# EAGLE board CT_schematic (EAGLE 7.6.0)

Size 100 x 80 mm. Coordinates in mm from the lower left corner, seen from the top.
Outline: 0,0 100,0 100,80 0,80 0,0
Copper layers (1*16): Top 0.035mm / dielectric 1.5mm / Bottom 0.035mm
Design rules "default": minimum track width 10mil, minimum drill 24mil, track to track 8mil, track to pad 8mil, pad to pad 8mil, via to via 8mil, smd to smd 8mil, copper to edge 40mil, drill to drill 8mil, minimum pad ring 10mil, minimum via ring 8mil, stop-mask expansion 4mil, vias tented up to drill 0mil, thermal gap 10mil

## Footprints (pad centres in the part's own frame; a part is rotated, then mirrored left to right if it is on the bottom)
C0603 = smd 0.8 x 0.8: 1 -0.762,0; 2 0.762,0
C0402 = smd 0.5 x 0.5: 1 -0.508,0; 2 0.508,0
C1210 = smd 1.2 x 2.5: 1 -1.524,0; 2 1.524,0
EXV-9H = smd 3.505 x 1.676: 1 -2.857,0; 2 2.857,0
L0603 = smd 0.8 x 0.8: 1 -0.762,0; 2 0.762,0
PJ-037B_PACKAGE = drill 3.7 square: 1 12,0 | drill 3.2 square: 2 6,0
R0603 = smd 0.8 x 0.8: 1 -0.762,0; 2 0.762,0
TFBGA64 = smd 0.35 x 0.35: A1 -1.75,1.75; A2 -1.25,1.75; A3 -0.75,1.75; A4 -0.25,1.75; A5 0.25,1.75; A6 0.75,1.75; A7 1.25,1.75; A8 1.75,1.75; B1 -1.75,1.25; B2 -1.25,1.25; B3 -0.75,1.25; B4 -0.25,1.25; B5 0.25,1.25; B6 0.75,1.25; B7 1.25,1.25; B8 1.75,1.25; C1 -1.75,0.75; C2 -1.25,0.75; C3 -0.75,0.75; C4 -0.25,0.75; C5 0.25,0.75; C6 0.75,0.75; C7 1.25,0.75; C8 1.75,0.75; D1 -1.75,0.25; D2 -1.25,0.25; D3 -0.75,0.25; D4 -0.25,0.25; D5 0.25,0.25; D6 0.75,0.25; D7 1.25,0.25; D8 1.75,0.25; E1 -1.75,-0.25; E2 -1.25,-0.25; E3 -0.75,-0.25; E4 -0.25,-0.25; E5 0.25,-0.25; E6 0.75,-0.25; E7 1.25,-0.25; E8 1.75,-0.25; F1 -1.75,-0.75; F2 -1.25,-0.75; F3 -0.75,-0.75; F4 -0.25,-0.75; F5 0.25,-0.75; F6 0.75,-0.75; F7 1.25,-0.75; F8 1.75,-0.75; G1 -1.75,-1.25; G2 -1.25,-1.25; G3 -0.75,-1.25; G4 -0.25,-1.25; G5 0.25,-1.25; G6 0.75,-1.25; G7 1.25,-1.25; G8 1.75,-1.25; H1 -1.75,-1.75; H2 -1.25,-1.75; H3 -0.75,-1.75; H4 -0.25,-1.75; H5 0.25,-1.75; H6 0.75,-1.75; H7 1.25,-1.75; H8 1.75,-1.75
SOIC-8 = smd 1.6 x 0.6: 1 -2.7,1.905 | smd 1.55 x 0.6: 2 -2.7,0.635; 3 -2.7,-0.635; 4 -2.7,-1.905; 5 2.7,-1.905; 6 2.7,-0.635; 7 2.7,0.635; 8 2.7,1.905
DFN8-S = smd 0.6 x 0.4: 1 -2.69,1.905; 2 -2.69,0.635; 3 -2.69,-0.635; 4 -2.69,-1.905; 5 2.69,-1.905; 6 2.69,-0.635; 7 2.69,0.635; 8 2.69,1.905
QFN65P400X400X100-17N = smd 1.016 x 0.356: 1 -1.803,0.965; 2 -1.803,0.33; 3 -1.803,-0.33; 4 -1.803,-0.965; 9 1.803,-0.965; 10 1.803,-0.33; 11 1.803,0.33; 12 1.803,0.965 | smd 0.356 x 1.016: 5 -0.965,-1.803; 6 -0.33,-1.803; 7 0.33,-1.803; 8 0.965,-1.803; 13 0.965,1.803; 14 0.33,1.803; 15 -0.33,1.803; 16 -0.965,1.803 | smd 2.108 x 2.108: 17 0,0
HTSS-105-01-G-D = drill 1 pad 1.8 square: 1 0,0 | drill 1 pad 1.8: 2 0,2.54; 3 2.54,0; 4 2.54,2.54; 5 5.08,0; 6 5.08,2.54; 7 7.62,0; 8 7.62,2.54; 9 10.16,0; 10 10.16,2.54
ABS07-32.768KHZ-7-T = smd 1.1 x 2.4: 1 -2.5,0; 2 0,0
ABLS-25.000MHZ-B2F-T = smd 5.6 x 2.8: 1 -3.81,0; 2 5.69,0
WSON-8 = smd 0.3 x 0.6: 1 -0.75,0; 2 0.05,0; 3 0.85,0; 4 1.65,0; 5 1.65,3.8; 6 0.85,3.8; 7 0.05,3.8; 8 -0.75,3.8 | smd 3 x 2.6: PAD 0.45,1.9
SON-6 = smd 0.55 x 0.3: 1 -0.355,0.5 | smd 0.52 x 0.3: 2 -0.37,0; 3 -0.37,-0.5; 4 0.37,-0.5; 5 0.37,0; 6 0.37,0.5
SW_4-1437565-2 = smd 1.4 x 2.1: 1 -2.23,4.55; 2 -2.23,-4.55; 3 2.23,4.55; 4 2.23,-4.55
LGM67K-G1J2-24-Z = smd 0.8 x 1.4: A -2,0; C 0,0
NC7SZ125M5X = smd 1.3 x 0.7: 1 -1.3,0.95; 2 -1.3,0; 3 -1.3,-0.95; 4 1.3,-0.95; 5 1.3,0.95

## Placement (x,y rotation side)
C1  1e-06  [C0603]  -33.02,60.96 0 top  (outside the outline)
C2  1e-07  [C0603]  -36.83,60.96 0 top  (outside the outline)
C3  1e-07  [C0603]  -40.64,60.96 0 top  (outside the outline)
C4  1e-07  [C0603]  -44.45,60.96 0 top  (outside the outline)
C5  1e-07  [C0603]  -48.26,60.96 0 top  (outside the outline)
C6  1e-07  [C0603]  -52.07,60.96 0 top  (outside the outline)
C7  4.7e-06  [C0603]  -29.21,60.96 0 top  (outside the outline)
C8  1e-08  [C0603]  -55.88,60.96 0 top  (outside the outline)
C9  1e-08  [C0603]  -59.69,60.96 0 top  (outside the outline)
C10  1e-06  [C0603]  -63.5,60.96 0 top  (outside the outline)
C11  1e-11  [C0402]  -49.53,66.04 0 top  (outside the outline)
C12  1e-11  [C0402]  -53.34,66.04 0 top  (outside the outline)
C13  1e-11  [C0402]  -57.15,66.04 0 top  (outside the outline)
C14  1e-11  [C0402]  -60.96,66.04 0 top  (outside the outline)
C15  1e-08  [C0402]  -64.77,66.04 0 top  (outside the outline)
C16  1e-08  [C0402]  -15.24,71.12 0 top  (outside the outline)
C17  1e-07  [C0402]  -19.05,71.12 0 top  (outside the outline)
C18  1e-07  [C0402]  -22.86,71.12 0 top  (outside the outline)
C19  1e-06  [C0603]  -67.31,60.96 0 top  (outside the outline)
C20  1e-08  [C0402]  -26.67,71.12 0 top  (outside the outline)
C21  1e-05  [C1210]  -48.26,49.53 0 top  (outside the outline)
C22  1e-05  [C1210]  -54.61,49.53 0 top  (outside the outline)
C23  1e-07  [C0402]  -30.48,71.12 0 top  (outside the outline)
C24  0.0001  [EXV-9H]  -17.78,41.91 0 top  (outside the outline)
C25  0.0001  [EXV-9H]  -29.21,41.91 0 top  (outside the outline)
C26  1e-08  [C0402]  -34.29,71.12 0 top  (outside the outline)
F1  240.0  [L0603]  -15.24,66.04 0 top  (outside the outline)
J1  PJ-037B  [PJ-037B_PACKAGE]  -54.61,7.62 0 top  (outside the outline)
R2  1000.0  [R0603]  -19.05,66.04 0 top  (outside the outline)
R4  4700.0  [R0603]  -22.86,66.04 0 top  (outside the outline)
R6  2200.0  [R0603]  -26.67,66.04 0 top  (outside the outline)
R7  2200.0  [R0603]  -30.48,66.04 0 top  (outside the outline)
R8  2200.0  [R0603]  -34.29,66.04 0 top  (outside the outline)
R9  10000.0  [R0603]  -25.4,55.88 0 top  (outside the outline)
R10  10000.0  [R0603]  -30.48,55.88 0 top  (outside the outline)
R11  10000.0  [R0603]  -35.56,55.88 0 top  (outside the outline)
R12  10000.0  [R0603]  -40.64,55.88 0 top  (outside the outline)
R13  10000.0  [R0603]  -45.72,55.88 0 top  (outside the outline)
R14  10000.0  [R0603]  -50.8,55.88 0 top  (outside the outline)
R15  10000.0  [R0603]  -55.88,55.88 0 top  (outside the outline)
R16  10000.0  [R0603]  -60.96,55.88 0 top  (outside the outline)
R17  10000.0  [R0603]  -66.04,55.88 0 top  (outside the outline)
R18  47.0  [R0603]  -38.1,66.04 0 top  (outside the outline)
R19  100000.0  [R0603]  -66.04,48.26 0 top  (outside the outline)
R20  1500.0  [R0603]  -41.91,66.04 0 top  (outside the outline)
R21  1000.0  [R0603]  -45.72,66.04 0 top  (outside the outline)
R22  10000.0  [R0603]  -15.24,60.96 0 top  (outside the outline)
R23  10000.0  [R0603]  -20.32,60.96 0 top  (outside the outline)
R24  18000.0  [R0603]  -25.4,60.96 0 top  (outside the outline)
R25  470000.0  [R0603]  -15.24,55.88 0 top  (outside the outline)
R26  120000.0  [R0603]  -20.32,55.88 0 top  (outside the outline)
U1  stm32f100r8h6  [TFBGA64]  -22.86,33.02 0 top  (outside the outline)
U2  AT25320B-SSHL-T  [SOIC-8]  -38.1,33.02 0 top  (outside the outline)
U3  24AA512-I/MF  [DFN8-S]  -41.91,21.59 0 top  (outside the outline)
U4  TSC2013QRSARQ1  [QFN65P400X400X100-17N]  -35.56,7.62 0 top  (outside the outline)
U5  HTSS-105-01-G-D  [HTSS-105-01-G-D]  -59.69,19.05 0 top  (outside the outline)
U6  ABS07-32.768KHZ-7-T  [ABS07-32.768KHZ-7-T]  -27.94,49.53 0 top  (outside the outline)
U7  ABLS-25.000MHZ-B2F-T  [ABLS-25.000MHZ-B2F-T]  -48.26,41.91 0 top  (outside the outline)
U8  LP3878SDX-ADJ/NOPB  [WSON-8]  -59.69,30.48 0 top  (outside the outline)
U9  TPS3895ADRYR  [SON-6]  -36.83,69.85 0 top  (outside the outline)
U10  4-1437565-2  [SW_4-1437565-2]  -27.94,21.59 0 top  (outside the outline)
U11  Q65110A2395  [LGM67K-G1J2-24-Z]  -36.83,49.53 0 top  (outside the outline)
U12  nc7sz125m5x  [NC7SZ125M5X]  -59.69,48.26 0 top  (outside the outline)

## Library data of the parts
C1-C26 F1 J1 R2 R4 R6-R26 U1-U12 = circuit_tree

## Nets
CLK_CRYSTAL_U1_A1: C11.1 U1.A1 U6.1
CLK_CRYSTAL_U1_B1: C12.1 U1.B1 U6.2
CLK_CRYSTAL_U1_C1: C13.1 U1.C1 U7.1
CLK_CRYSTAL_U1_D1: C14.1 U1.D1 U7.2
GND: C1.2 C2.2 C3.2 C4.2 C5.2 C6.2 C7.2 C8.2 C9.2 C10.2 C11.2 C12.2 C13.2 C14.2 C15.2 C16.2 C20.2 C21.2 C22.2 C23.2 C24.2 C25.2 C26.2 J1.2 R2.2 R9.2 R13.2 R21.2 R24.2 R26.2 U1.C2 U1.D4 U1.D5 U1.D6 U1.F1 U2.4 U3.4 U4.17 U5.9 U8.3 U8.PAD U9.2 U11.C U12.1 U12.3
NET_U1_A3: R6.1 U1.A3 U4.1
NET_U1_B4: R9.1 U1.B4
NET_U1_E1: R4.1 U1.E1 U12.4
NET_U1_G7: R7.1 U1.G7 U3.6
NET_U1_H1: C8.1 C9.1 C10.1 F1.1 U1.G1 U1.H1
NET_U1_H6: U11.A
NET_U1_H7: R8.1 U1.H7 U3.5
NET_U1_H8: U10.3 U10.4
NET_U2_3: R10.1 U2.3
NET_U2_7: R12.1 U2.7
NET_U3_1: R13.1 U3.1
NET_U3_2: R14.1 U3.2
NET_U3_3: R15.1 U3.3
NET_U4_4: R17.1 U4.4
NET_U4_5: R16.1 U4.5
NET_U4_9: C17.2 C18.2 C19.2 R18.2 U4.9
NET_U4_15: R18.1 U4.8 U4.15
NET_U5_3: U4.12 U5.3
NET_U5_4: U4.14 U5.4
NET_U5_5: U4.11 U5.5
NET_U5_6: U4.13 U5.6
NET_U8_1: C20.1 U8.1
NET_U8_6: R20.2 R21.1 U8.6
NET_U8_8: R19.1 U8.8
NET_U9_1: R23.1 R24.1 U9.1
NET_U9_3: R25.2 R26.1 U9.3
NET_U9_4: R22.1 U9.4 U12.2
NET_U10_1: R2.1 U10.1 U10.2
PROC_SPI1_MISO: U1.A4 U2.2
PROC_SPI1_MOSI: U1.C4 U2.5
PROC_SPI1_NSS: R11.1 U1.A6 U2.1
PROC_SPI1_SCK: U1.A5 U2.6
VCC_S1_11V6: C21.1 C24.1 C25.1 J1.1 R19.2 U8.4
VCC_TIER1_2V5: C1.1 C2.1 C3.1 C4.1 C5.1 C6.1 C7.1 C15.1 C16.1 C17.1 C18.1 C19.1 C22.1 C23.1 C26.1 F1.2 R4.2 R6.2 R7.2 R8.2 R10.2 R11.2 R12.2 R14.2 R15.2 R16.2 R17.2 R20.1 R22.2 R23.2 R25.1 U1.B2 U1.D2 U1.E4 U1.E5 U1.E6 U2.8 U3.7 U3.8 U4.7 U4.10 U8.5 U9.6 U12.5

## Tracks (layer width: path | path; a pad name or v marks a point on that pad's centre or on a via)
CLK_CRYSTAL_U1_A1  (2 unrouted)
CLK_CRYSTAL_U1_B1  (2 unrouted)
CLK_CRYSTAL_U1_C1  (2 unrouted)
CLK_CRYSTAL_U1_D1  (2 unrouted)
GND  (44 unrouted)
NET_U1_A3  (2 unrouted)
NET_U1_B4  (1 unrouted)
NET_U1_E1  (2 unrouted)
NET_U1_G7  (2 unrouted)
NET_U1_H1  (5 unrouted)
NET_U1_H7  (2 unrouted)
NET_U1_H8  (1 unrouted)
NET_U2_3  (1 unrouted)
NET_U2_7  (1 unrouted)
NET_U3_1  (1 unrouted)
NET_U3_2  (1 unrouted)
NET_U3_3  (1 unrouted)
NET_U4_4  (1 unrouted)
NET_U4_5  (1 unrouted)
NET_U4_9  (4 unrouted)
NET_U4_15  (2 unrouted)
NET_U5_3  (1 unrouted)
NET_U5_4  (1 unrouted)
NET_U5_5  (1 unrouted)
NET_U5_6  (1 unrouted)
NET_U8_1  (1 unrouted)
NET_U8_6  (2 unrouted)
NET_U8_8  (1 unrouted)
NET_U9_1  (2 unrouted)
NET_U9_3  (2 unrouted)
NET_U9_4  (2 unrouted)
NET_U10_1  (2 unrouted)
PROC_SPI1_MISO  (1 unrouted)
PROC_SPI1_MOSI  (1 unrouted)
PROC_SPI1_NSS  (2 unrouted)
PROC_SPI1_SCK  (1 unrouted)
VCC_S1_11V6  (5 unrouted)
VCC_TIER1_2V5  (43 unrouted)